# Altium PCB atxmega.PcbDoc
Units mm, origin at the board's own origin, x right, y up, seen from the top; angles counter-clockwise.
Board outline 50.2 x 35.2 mm, 2 copper layers (Top Layer, Bottom Layer); 21 components, 14 nets, 187 pads, 16 vias.
Unrouted connection lines stored in the file: 54.
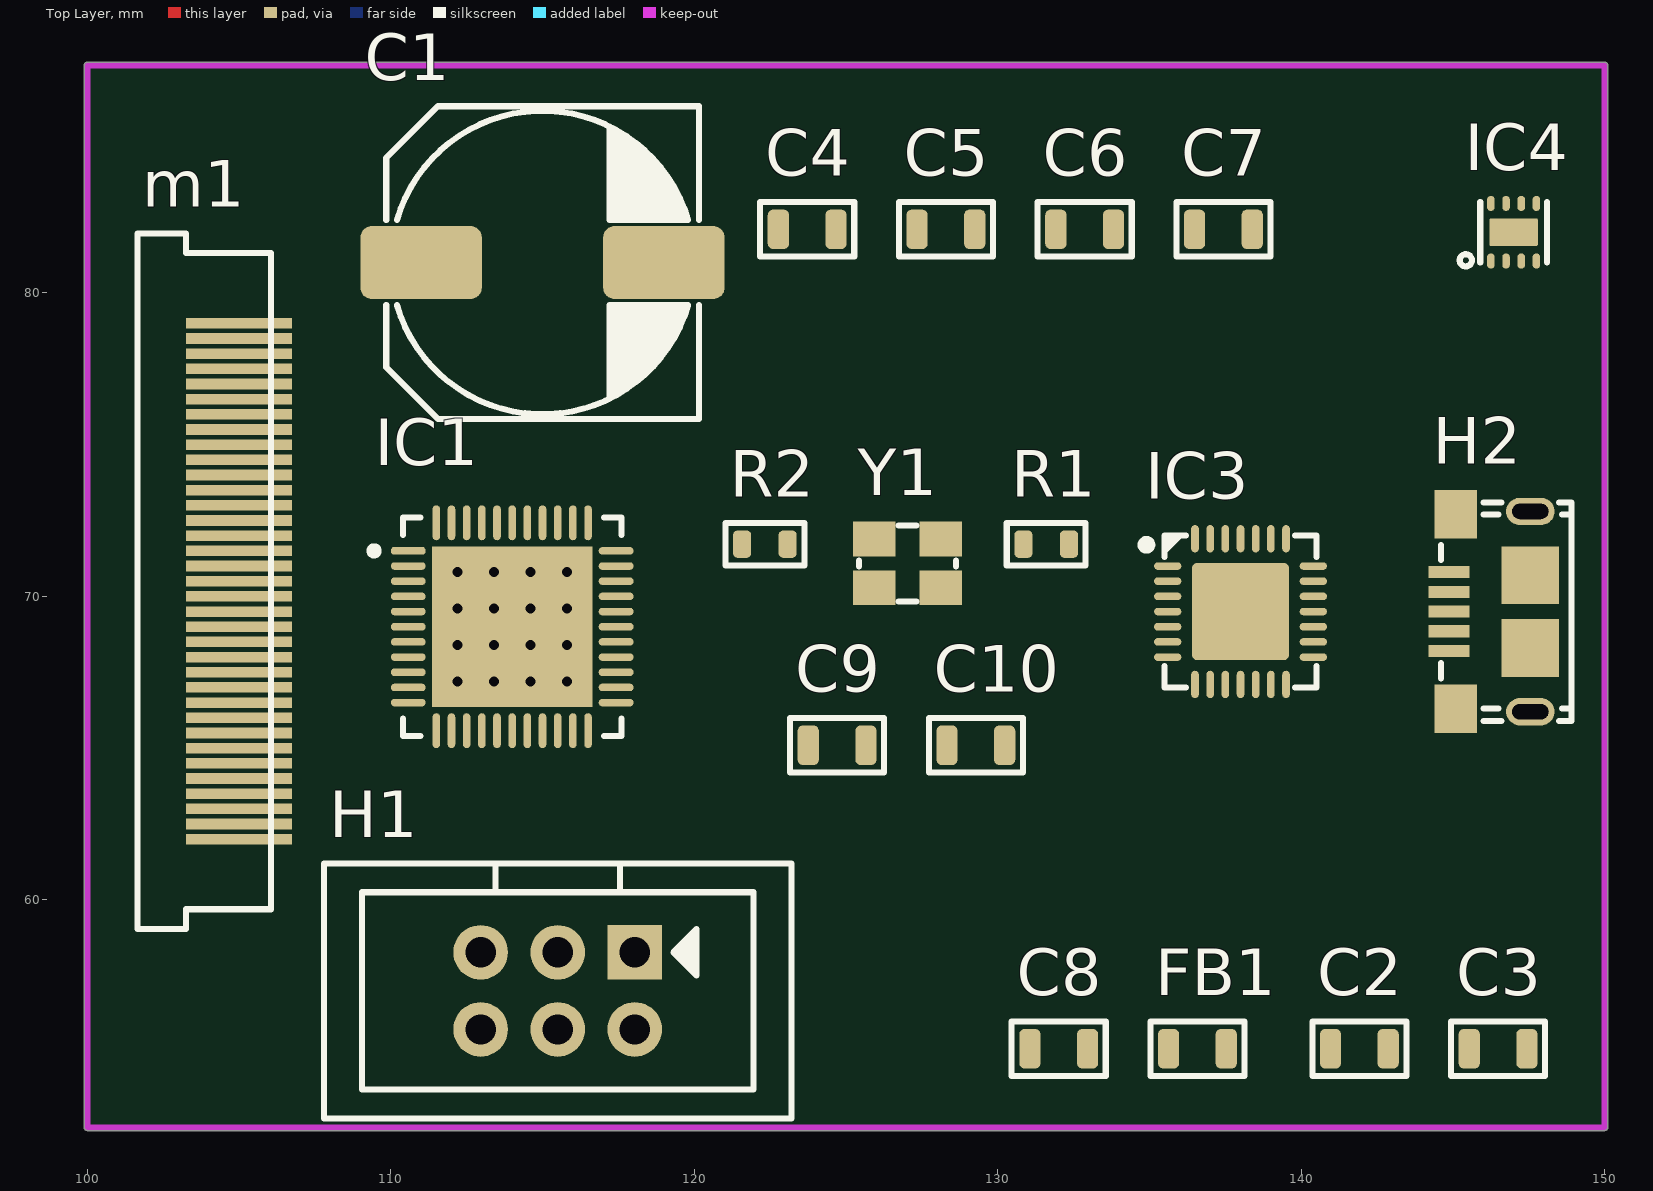
[diagram p0: Top Layer view]
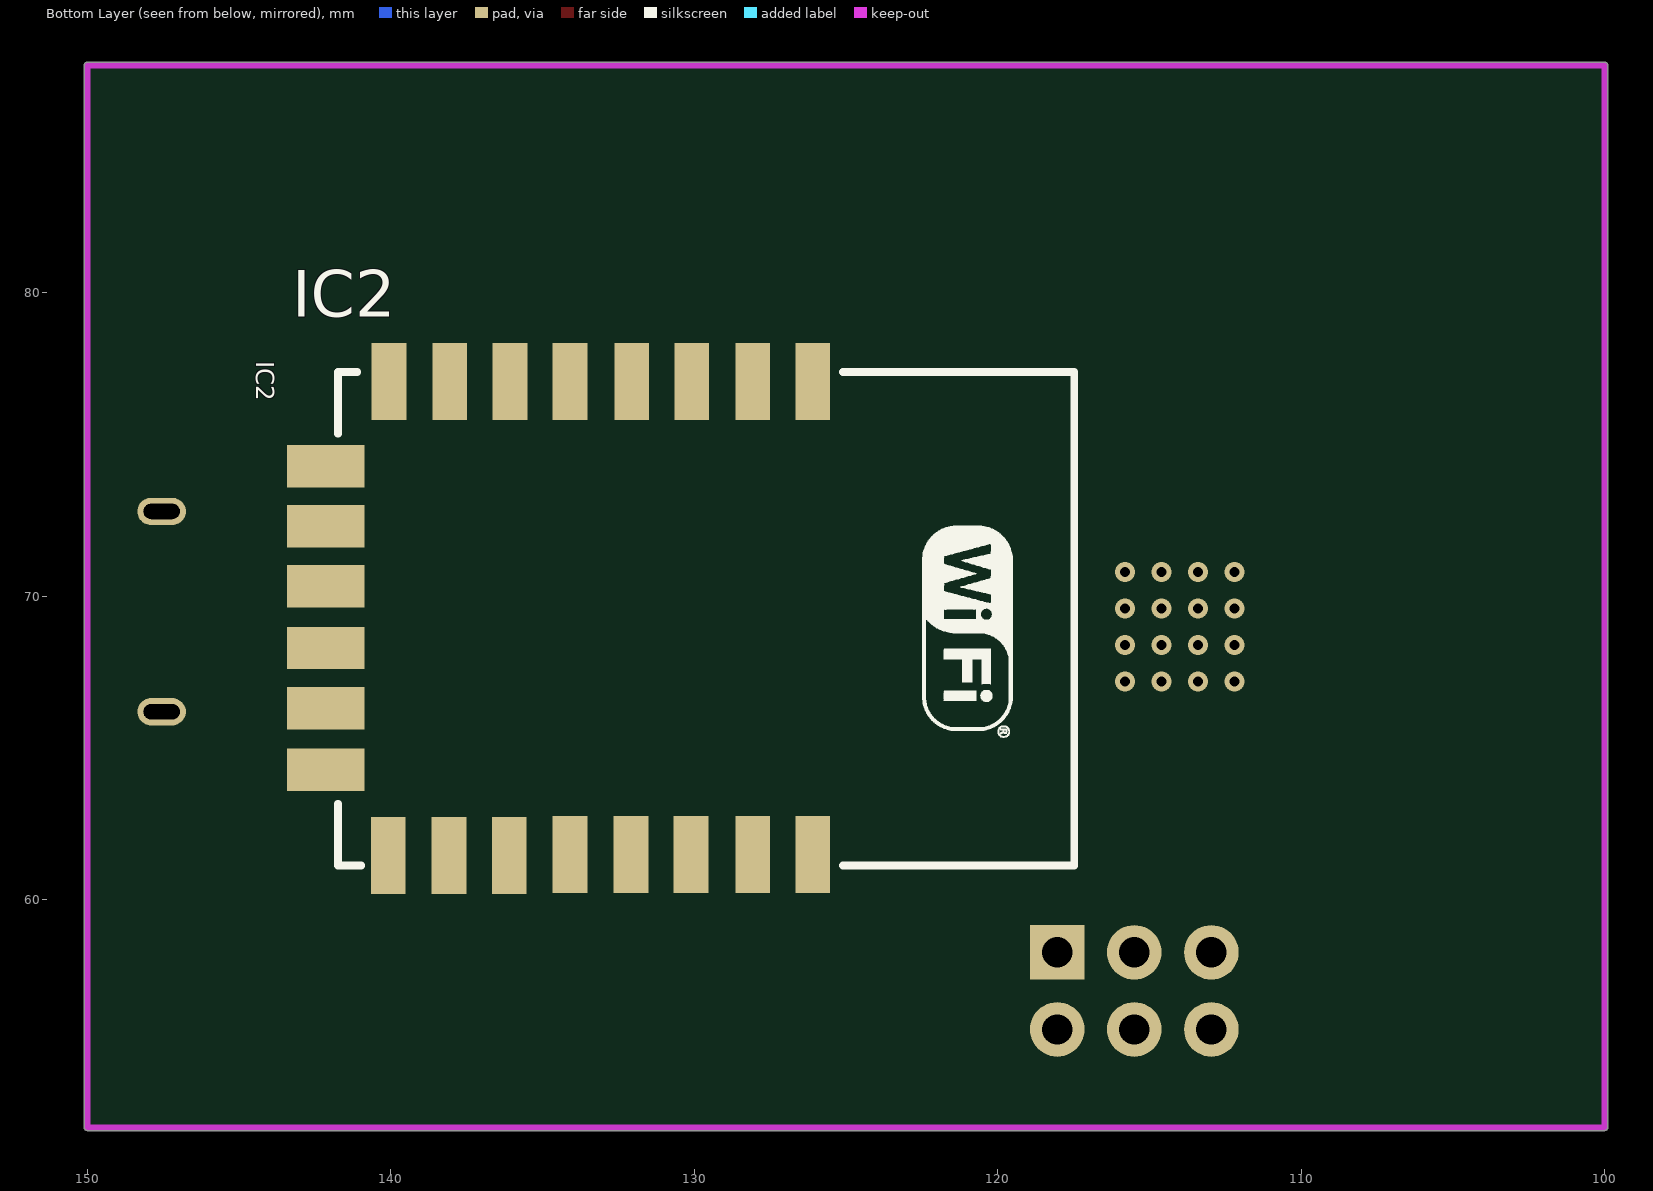
[diagram p1: Bottom Layer view, seen from below]

## Layer stack, top to bottom
Top Solder: solder mask 0.0102, Solder Resist, Dk 3.5
Top Layer: signal copper 0.0356
Dielectric 1: dielectric 0.32, FR-4, Dk 4.8
Bottom Layer: signal copper 0.0356
Bottom Solder: solder mask 0.0102, Solder Resist, Dk 3.5

## Board outline
99.9,52.5 ccw(c100,52.5) 100,52.4 150,52.4 ccw(c150,52.5) 150.1,52.5 150.1,87.5 ccw(c150,87.5) 150,87.6 100,87.6 ccw(c100,87.5) 99.9,87.5

## Design rules (kind name [scope] priority, off if disabled: settings)
Clearance [All] p1: gap=0.254
PolygonConnect [All] p1: connectstyle=Relief reliefconductorwidth=0.254 reliefentries=4 polygonreliefangle="90 Angle" airgapwidth=0.254
RoutingVias [All] p1: holewidth=0.711 width=1.27 viastyle="Through Hole" minholewidth=0.711 minwidth=1.27 maxholewidth=0.711 maxwidth=1.27
SolderMaskExpansion [All] p1: expansion=0.102
Width [All] p1: maxlimit=0.254 minlimit=0.254 preferedwidth=0.254
30 further rules are at their usual default settings.

## Components (designator, comment, footprint, x,y, rotation, side; value= is the part's Value field where it differs from the comment)
C1 "4.7uF" ELCO_SMD_7.7X10X4 115,81 r0 top
C2 "100nF" C0805 141.915,55.094 r0 top
C3 "100nF" C0805 146.487,55.094 r0 top
C4 "100nF" C0805 123.721,82.094 r0 top
C5 "100nF" C0805 128.293,82.094 r0 top
C6 "100nF" C0805 132.865,82.094 r0 top
C7 "100nF" C0805 137.437,82.094 r0 top
C8 "100nF" C0805 132.009,55.094 r0 top
C9 "100nF" C0805 124.706,65.094 r0 top
C10 "1uF" C0805 129.278,65.094 r0 top
FB1 "?R @ ?MHz" L0805 136.581,55.094 r0 top
H1 "Header_PDI" 6-HEADER_BOXED 115.5,57 r180 top
H2 "USB_5pin" USB_Micro_B_RECEPTABLE_FCI 149,69.5 r90 top
IC1 "ATXMEGA128A4U-MH" 44-VFQFN-E 114,69 r0 top
IC2 "ESP8266 ESP-12-E" "ESP8266 ESP-12-E" 142.5,60.5 r270 bottom
IC3 "CP_2102" 28-QFN_Exposed_pad 138,69.5 r0 top
IC4 "TPS62170" 8-WFDFN_PAD 147,82 r0 top
m1 "OEL Display Module" FFC-35-pin-0.5 105,70.5 r0 top
R1 "10k" R0603 131.598,71.721 r0 top
R2 "10k" R0603 122.327,71.721 r0 top
Y1 "Crystal_Ground" Crystal_3.2x2.5 127.026,71.086 r0 top

## Footprints (in the part's own frame and the unit in brackets; to place one, negate y for a bottom-side part, rotate by r counter-clockwise, add the part's x,y. Pads: shape width x height; smd on the part's side, far side on the other; paste and mask are expansions set on the pad)
6-HEADER_BOXED [mm]
  rect 1.8x1.8 hole 1: 1(-2.54,-1.27)
  round 1.8 hole 1: 2(-2.54,1.27) 3(0,-1.27) 4(0,1.27) 5(2.54,-1.27) 6(2.54,1.27)
  silkscreen extent -7.7,-4.2 7.7,4.2, body extent -7.7,-4.2 7.7,4.2, height 9.3
8-WFDFN_PAD [mm] "8-WFDFN Exposed Pad, 8-WSON (2x2)"
  oval 0.25x0.5 smd mask+0.07: 1(-0.75,-0.95) 2(-0.25,-0.95) 3(0.25,-0.95) 4(0.75,-0.95) 5(0.75,0.95) 6(0.25,0.95) 7(-0.25,0.95) 8(-0.75,0.95)
  rrect10% 1.6x0.9 smd paste-0.15 mask+0.07: PAD(0,0)
  silkscreen extent -1.78,-1.13 1.1,1, body extent -1,-1.01 1,1.01, height 0.75
28-QFN_Exposed_pad [mm] "QFN, 28-Leads, Body 5,00x5,00mm, Pitch 0,50mm"
  oval 0.9x0.25 smd: 1(-2.4,1.5) 2(-2.4,1) 3(-2.4,0.5) 4(-2.4,0) 5(-2.4,-0.5) 6(-2.4,-1) 7(-2.4,-1.5) 15(2.4,-1.5) 16(2.4,-1) 17(2.4,-0.5) 18(2.4,0) 19(2.4,0.5) 20(2.4,1) 21(2.4,1.5)
  oval 0.25x0.9 smd: 8(-1.5,-2.4) 9(-1,-2.4) 10(-0.5,-2.4) 11(0,-2.4) 12(0.5,-2.4) 13(1,-2.4) 14(1.5,-2.4) 22(1.5,2.4) 23(1,2.4) 24(0.5,2.4) 25(0,2.4) 26(-0.5,2.4) 27(-1,2.4) 28(-1.5,2.4)
  rrect10% 3.2x3.2 smd paste-20: PAD(0,0)
  silkscreen extent -3.24,-2.5 2.5,2.5, body extent -2.52,-2.52 2.52,2.52, height 0.91
44-VFQFN-E [mm] "44-VFQFN Exposed Pad  7x7"
  oct 1.15x0.25 smd: 1(-3.425,2.5)
  oval 1.15x0.25 smd: 2(-3.425,2) 3(-3.425,1.5) 4(-3.425,1) 5(-3.425,0.5) 6(-3.425,0) 7(-3.425,-0.5) 8(-3.425,-1) 9(-3.425,-1.5) 10(-3.425,-2) 11(-3.425,-2.5) 23(3.425,-2.5) 24(3.425,-2) 25(3.425,-1.5) 26(3.425,-1) 27(3.425,-0.5) 28(3.425,0) 29(3.425,0.5) 30(3.425,1) 31(3.425,1.5) 32(3.425,2) 33(3.425,2.5)
  oval 0.25x1.15 smd: 12(-2.5,-3.425) 13(-2,-3.425) 14(-1.5,-3.425) 15(-1,-3.425) 16(-0.5,-3.425) 17(0,-3.425) 18(0.5,-3.425) 19(1,-3.425) 20(1.5,-3.425) 21(2,-3.425) 22(2.5,-3.425) 34(2.5,3.425) 35(2,3.425) 36(1.5,3.425) 37(1,3.425) 38(0.5,3.425) 39(0,3.425) 40(-0.5,3.425) 41(-1,3.425) 42(-1.5,3.425) 43(-2,3.425) 44(-2.5,3.425)
  rect 5.3x5.3 smd: 45(0,0)
  silkscreen extent -4.67,-3.6 3.6,3.6, body extent -3.57,-3.57 3.57,3.57, height 1
C0805 [mm]
  rrect50% 0.7x1.3 smd: 1(-0.95,0) 2(0.95,0)
  silkscreen extent -1.55,-0.9 1.55,0.9, body extent -1.01,-0.61 1.01,0.61, height 0.81
Crystal_3.2x2.5 [mm]
  rect 1.4x1.15 smd: 1(-1.1,-0.8) 2(-1.1,0.8) 2(1.1,-0.8) 3(1.1,0.8)
  silkscreen extent -1.6,-1.25 1.6,1.25, body extent -1.6,-1.25 1.6,1.25, height 0.6
ELCO_SMD_7.7X10X4 [mm]
  rrect30% 4x2.4 smd: NEG(4,0) POS(-4,0)
  silkscreen extent -5.15,-5.15 5.15,5.15, body extent -5.7,-5.15 5.7,5.15, height 7.72
"ESP8266 ESP-12-E" [mil] "ESP8266 ESP-12-E"
  rect 100x45 smd: 1(-653,646) 2(-653,568) 3(-653,489) 4(-653,411) 5(-653,331) 6(-653,253) 7(-653,175) 8(-653,96) 15(-38,95) 16(-38,174) 17(-38,252) 18(-39,331) 19(-39,410) 20(-39,488) 21(-39,568) 22(-39,646)
  rect 55x100 smd: 9(-543,14) 10(-465,14) 11(-387,14) 12(-307,14) 13(-229,14) 14(-149,14)
  silkscreen extent -665,30 -25,985, body extent -660,38 -30,982
FFC-35-pin-0.5 [mm] "Flat Flexible Connector 35 positions pitch 0.5mm"
  rect 3.5x0.35 smd: 1(0,8.5) 2(0,8) 3(0,7.5) 4(0,7) 5(0,6.5) 6(0,6) 7(0,5.5) 8(0,5) 9(0,4.5) 10(0,4) 11(0,3.5) 12(0,3) 13(0,2.5) 14(0,2) 15(0,1.5) 16(0,1) 17(0,0.5) 18(0,0) 19(0,-0.5) 20(0,-1) 21(0,-1.5) 22(0,-2) 23(0,-2.5) 24(0,-3) 25(0,-3.5) 26(0,-4) 27(0,-4.5) 28(0,-5) 29(0,-5.5) 30(0,-6) 31(0,-6.5) 32(0,-7) 33(0,-7.5) 34(0,-8) 35(0,-8.5)
  silkscreen extent -3.35,-11.47 1.05,11.47, body extent -3.35,-11.48 1.05,11.42, height 2
L0805 [mm]
  rrect50% 0.7x1.3 smd: 1(-0.95,0) 2(0.95,0)
  silkscreen extent -1.55,-0.9 1.55,0.9, body extent -1.01,-0.61 1.01,0.61, height 0.81
R0603 [mm]
  rrect50% 0.6x0.9 smd: 1(-0.75,0) 2(0.75,0)
  silkscreen extent -1.3,-0.7 1.3,0.7, body extent -0.86,-0.41 0.86,0.41, height 0.51
USB_Micro_B_RECEPTABLE_FCI [mm] "Micro USB header, surface mount with slots right angle"
  rect 0.4x1.35 smd: 1(-1.3,4.125) 2(-0.65,4.125) 3(0,4.125) 4(0.65,4.125) 5(1.3,4.125)
  oval 0.9x1.6 hole 0.5 slot 1.2 at 90 deg paste+0: SHIELD(-3.3,1.45)
  rect 1.6x1.4 smd: SHIELD(-3.2,3.9) SHIELD(3.2,3.9)
  rect 1.9x1.9 smd: SHIELD(-1.2,1.45) SHIELD(1.2,1.45)
  oval 0.9x1.6 hole 0.5 slot 1.2 at 90 deg paste+1: SHIELD(3.3,1.45)
  silkscreen extent -3.6,0.1 3.6,4.4, body extent -3.99,-0.8 3.99,4.63, height 2.71

## Part data
C1: library part Capacitor_pol, "Schematic symbol of a polarized capacitor"
C2 C3 C4 C5 C6 C7 C8 C9 C10: library part Capacitor, "Schematic symbol of a capacitor"
FB1: library part Ferrite
H1: "6-pin Boxed header with pinout used for PDI programming by Atmel programmers"
H2: "5 Pins USB Connector"
IC1: "AVR AVR® XMEGA® A4U Microcontroller IC 8/16-Bit 32MHz 128KB (64K x 16) FLASH 44-VQFN (7x7)"
IC3: "Single chip USB to UART Bridge"
IC4: "3-17V 0.5A Step-Down Converter with DCS-Control"
m1: "Part ID: UG-6028GDEAF01"
R1 R2: library part Resistor, "Schematic symbol of a resistor"
Y1: "Schematic symbol of a 2pin crystal with case connection"

## Via types
v1: diameter 0.66, hole 0.33, Top Layer to Bottom Layer, 16 vias

## Nets (pads, with @x,y where several pads share a name; then routed paths per layer and width w, separated by ;. In a path a pad name is that pad's centre, name@x,y a point inside that pad or via, vN(x,y) a via of type N, cw(c..) or ccw(c..) an arc to the next point about the centre after c; other vN are vias at no path point)
3V3: C4.1 C5.1 C6.1 C7.1 FB1.2 H1.2 IC1.9 IC1.19 IC1.31 R1.1 R2.1
AVCC: C8.1 FB1.1 IC1.39
CP_RX: IC1.33 IC3.25
CP_TX: IC1.32 IC3.26
GND: C1.NEG C2.1 C3.1 C4.2 C5.2 C6.2 C7.2 C8.2 C9.1 C10.1 H1.6 H2.5 H2.SHIELD IC1.8 IC1.18 IC1.30 IC1.38 IC1.45 IC3.3 IC3.PAD Y1.2
  other v1: 112.2,67.2 113.4,67.2 114.6,67.2 115.8,67.2 112.2,68.4 113.4,68.4 114.6,68.4 115.8,68.4 112.2,69.6 113.4,69.6 114.6,69.6 115.8,69.6 112.2,70.8 113.4,70.8 114.6,70.8 115.8,70.8
NetH1_1: H1.1 IC1.34
NetH1_5: H1.5 IC1.35 R1.2
NetH2_2: H2.2 IC3.5
NetH2_3: H2.3 IC3.4
NetIC1_36: IC1.36 Y1.1
NetIC1_37: IC1.37 Y1.3
NetIC3_9: IC3.9 R2.2
VREF: C1.POS C2.2 C3.2
VUSB: C9.2 C10.2 H2.1 IC3.7 IC3.8
pads on no net: H1.3 H1.4 H2.4 IC1.1 IC1.2 IC1.3 IC1.4 IC1.5 IC1.6 IC1.7 IC1.10 IC1.11 IC1.12 IC1.13 IC1.14 IC1.15 IC1.16 IC1.17 IC1.20 IC1.21 IC1.22 IC1.23 IC1.24 IC1.25 IC1.26 IC1.27 IC1.28 IC1.29 IC1.40 IC1.41 IC1.42 IC1.43 IC1.44 IC2.1 IC2.2 IC2.3 IC2.4 IC2.5 IC2.6 IC2.7 IC2.8 IC2.9 IC2.10 IC2.11 IC2.12 IC2.13 IC2.14 IC2.15 IC2.16 IC2.17 IC2.18 IC2.19 IC2.20 IC2.21 IC2.22 IC3.1 IC3.2 IC3.6 IC3.10 IC3.11 IC3.12 IC3.13 IC3.14 IC3.15 IC3.16 IC3.17 IC3.18 IC3.19 IC3.20 IC3.21 IC3.22 IC3.23 IC3.24 IC3.27 IC3.28 IC4.1 IC4.2 IC4.3 IC4.4 IC4.5 IC4.6 IC4.7 IC4.8 IC4.PAD m1.1 m1.2 m1.3 m1.4 m1.5 m1.6 m1.7 m1.8 m1.9 m1.10 m1.11 m1.12 m1.13 m1.14 m1.15 m1.16 m1.17 m1.18 m1.19 m1.20 m1.21 m1.22 m1.23 m1.24 m1.25 m1.26 m1.27 m1.28 m1.29 m1.30 m1.31 m1.32 m1.33 m1.34 m1.35

## Keep-outs
Keep-Out Layer:
  lines w0.2: 135,87.5 150,87.5 ; 150,87.5 150,52.5 100,52.5 100,87.5 150,87.5

## Text inside footprints (layer, text, board x,y; h text height)
IC2: Mechanical 13 "CUTOUT POLYGON" at 118.609,77.085 h0.25 r90; Mechanical 13 "ANTENNA AREA" at 118.101,77.085 h0.25 r90